# EAGLE board PIRat (EAGLE 9.6.0)
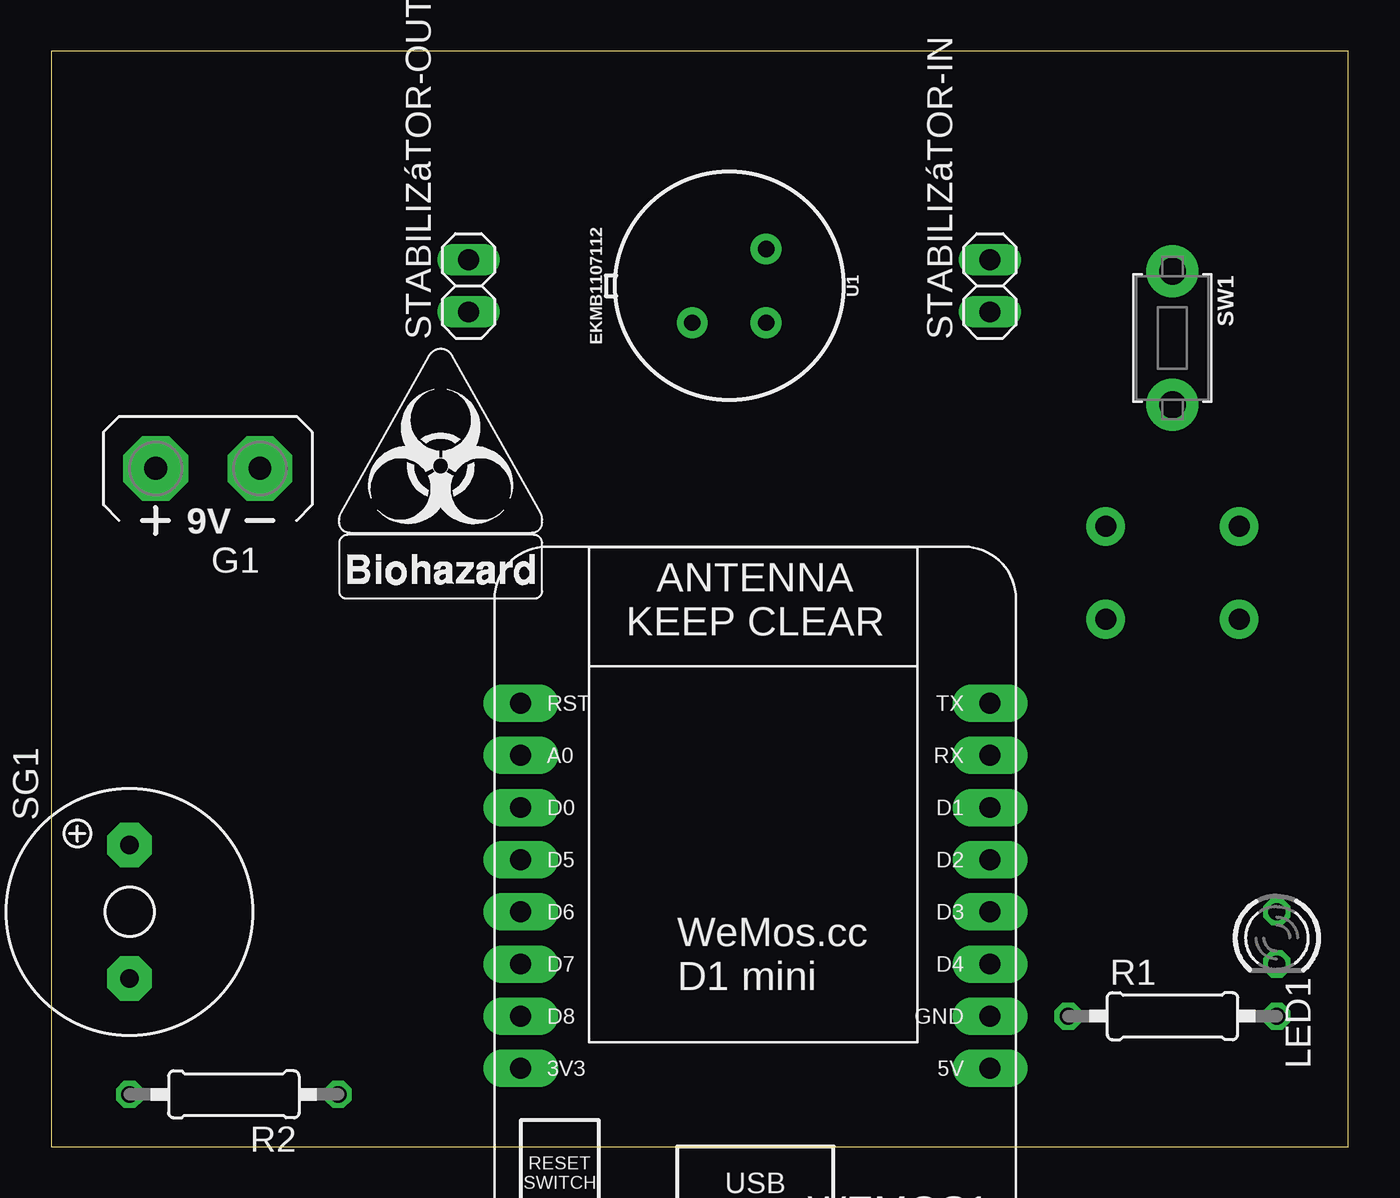
[diagram p0: board, top side]
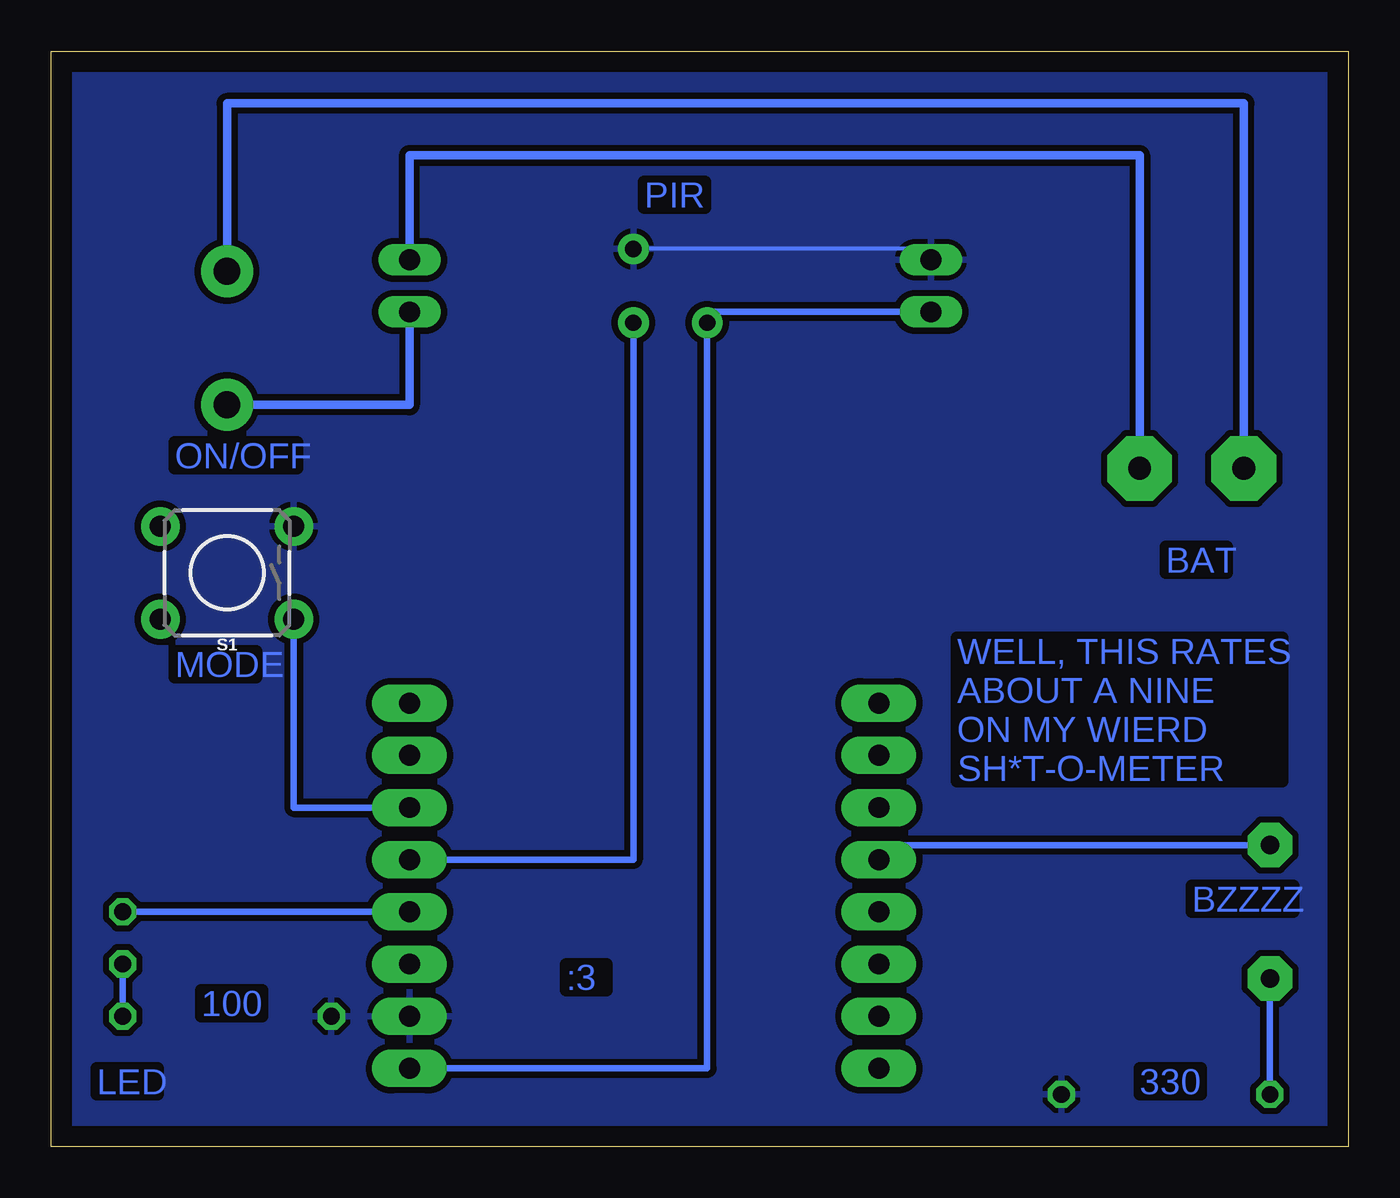
[diagram p1: board, bottom side, seen from below]

Size 63.17 x 53.33 mm. Coordinates in mm from the lower left corner, seen from the top.
Outline: 0,0 63.17,0 63.17,53.33 0,53.33 0,0
Copper layers (1*16): Top 0.035mm / dielectric 1.5mm / Bottom 0.035mm
Design rules "default": minimum track width 6mil, minimum drill 0.35mm, track to track 6mil, track to pad 6mil, pad to pad 6mil, via to via 6mil, smd to smd 6mil, copper to edge 40mil, drill to drill 6mil, minimum pad ring 10mil, minimum via ring 8mil, stop-mask expansion 4mil, vias tented up to drill 0mil, thermal gap 10mil

## Footprints (pad centres in the part's own frame; a part is rotated, then mirrored left to right if it is on the bottom)
AB9V = drill 1.118 pad 3.15 octagon: + 0,2.54; - 0,-2.54
LED3MM = drill 0.813 octagon: A -1.27,0; K 1.27,0
0207/10 = drill 0.813 octagon: 1 -5.08,0; 2 5.08,0
TACTILE_SWITCH_PTH_6.0MM_KIT = drill 1.016 pad 1.88: 1 -3.251,2.261; 2 3.251,2.261; 3 -3.251,-2.261; 4 3.251,-2.261
F/QMBIII = drill 0.914 pad 2.159 octagon: + 3.251,0; - -3.251,0
1X02 = drill 1.016 long: 1 -1.27,0; 2 1.27,0
TACT_PANA-EVQ = drill 1.3 pad 2.54: P$1 -3.25,0; P$2 3.25,0
TO-3 = drill 0.8 pad 1.5: GND -1.796,1.796; OUT 1.796,1.796; VDD 1.796,-1.796
WEMOS-D1-MINI = drill 1.016 pad 1.829 long: 3V3 -10.16,-10.16; 5V 12.7,-10.16; A0 -10.16,5.08; D0 -10.16,2.54; D1 12.7,2.54; D2 12.7,0; D3 12.7,-2.54; D4 12.7,-5.08; D5 -10.16,0; D6 -10.16,-2.54; D7 -10.16,-5.08; D8 -10.16,-7.62; GND 12.7,-7.62; RESET -10.16,7.62; RX 12.7,5.08; TX 12.7,7.62

## Placement (x,y rotation side)
E$1  [BIOHAZARD_10.00]  13.97,26.67 0 top
G1  AB9V  [AB9V]  7.62,33.02 90 top
LED1  [LED3MM]  59.69,10.16 270 top
R1  100R  [0207/10]  54.61,6.35 0 top
R2  330R  [0207/10]  8.89,2.54 180 top
S1  MOMENTARY-SWITCH-SPST-PTH-6.0MM-KIT  [TACTILE_SWITCH_PTH_6.0MM_KIT]  54.61,27.94 180 bottom
SG1  F/QMBIII  [F/QMBIII]  3.81,11.43 90 top
STABILIZáTOR-IN  [1X02]  45.72,41.91 90 top
STABILIZáTOR-OUT  [1X02]  20.32,41.91 90 top
SW1  [TACT_PANA-EVQ]  54.61,39.37 270 top
U1  EKMB1107112  [TO-3]  33.02,41.91 270 top
WEMOS1  [WEMOS-D1-MINI]  33.02,13.97 0 top

## Library data of the parts
E$1 = logo
G1 = battery
LED1 = led
R1 R2 = eagle-ltspice; SPICEMODEL: NONE; SPICEPREFIX: R
S1 = SparkFun-Switches; PROD_ID: SWCH-08441; SF_SKU: COM-00097
SG1 = buzzer; OC_FARNELL: unknown; OC_NEWARK: unknown
STABILIZáTOR-IN STABILIZáTOR-OUT = Airquality_Sensor
SW1 = adafruit
U1 = SparkFun-Sensors; PROD_ID: IC-15370
WEMOS1 = esp8266modules

## Nets
GND: R1.1 R2.1 S1.3 STABILIZáTOR-OUT.2 U1.GND WEMOS1.GND
N$1: LED1.A WEMOS1.D3
N$2: LED1.K R1.2
N$3: G1.+ SW1.P$1
N$4: U1.OUT WEMOS1.D2
N$5: SG1.+ WEMOS1.D5
N$6: R2.2 SG1.-
N$7: S1.1 WEMOS1.D1
N$8: G1.- STABILIZáTOR-IN.2
N$11: STABILIZáTOR-IN.1 SW1.P$2
N$12: STABILIZáTOR-OUT.1 U1.VDD WEMOS1.5V

## Tracks (layer width: path | path; a pad name or v marks a point on that pad's centre or on a via)
GND
  Bottom 0.2: STABILIZáTOR-OUT.2 20.32,43.71 U1.GND
  pour Bottom (isolate 0.305): 0,53.34 66.04,53.34 66.04,0 0,0
N$1
  Bottom 0.305: WEMOS1.D3 LED1.A
N$2
  Bottom 0.305: LED1.K R1.2
N$3
  Bottom 0.406: G1.+ 5.08,50.8 54.61,50.8 SW1.P$1
N$4
  Bottom 0.305: U1.OUT 34.82,13.97 WEMOS1.D2
N$5
  Bottom 0.305: SG1.+ 22.86,14.68 WEMOS1.D5
N$6
  Bottom 0.305: R2.2 SG1.-
N$7
  Bottom 0.305: S1.1 51.36,16.51 WEMOS1.D1
N$8
  Bottom 0.406: STABILIZáTOR-IN.2 45.72,48.26 10.16,48.26 G1.-
N$11
  Bottom 0.406: SW1.P$2 45.72,36.12 STABILIZáTOR-IN.1
N$12
  Bottom 0.2: 31.22,40.64 U1.VDD
  Bottom 0.305: U1.VDD 31.22,3.81 WEMOS1.5V | STABILIZáTOR-OUT.1 31.22,40.64

## Text on the board
Bottom: PIR | ON/OFF | BAT | MODE | WELL, THIS RATES / ABOUT A NINE / ON MY WIERD / SH*T-O-METER | BZZZZ | :3 | 100 | 330 | LED